# Altium PCB Push_Pull_Pot_Breakout.PcbDoc
Units mil, origin at the board's own origin, x right, y up, seen from the top; angles counter-clockwise.
Board outline 870 x 1070 mil, 2 copper layers (Top Layer, Bottom Layer); 2 components, 10 nets, 20 pads, 2 vias.
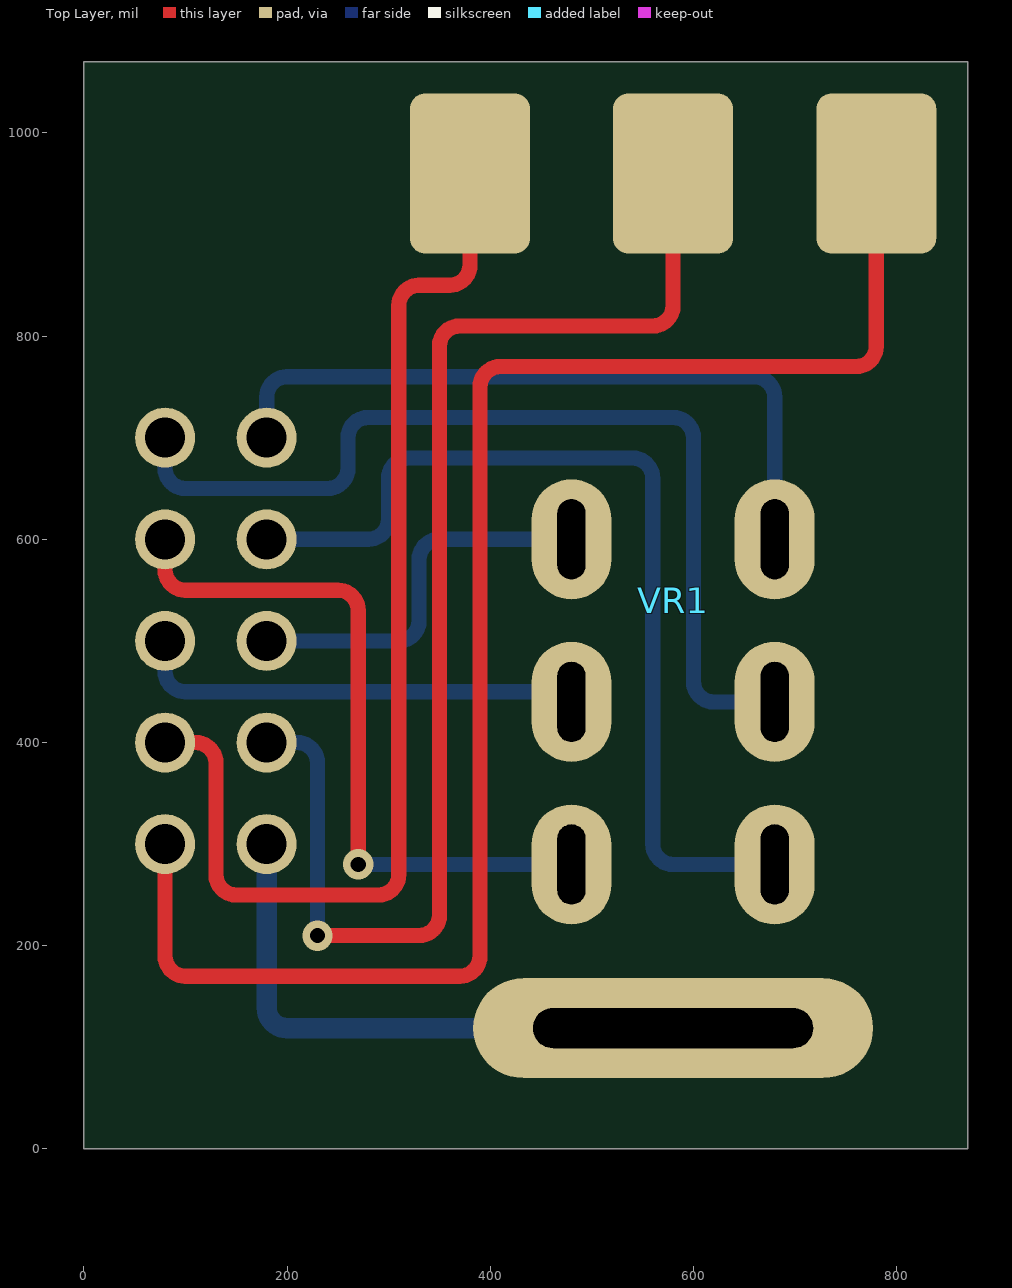
[diagram p0: Top Layer view]
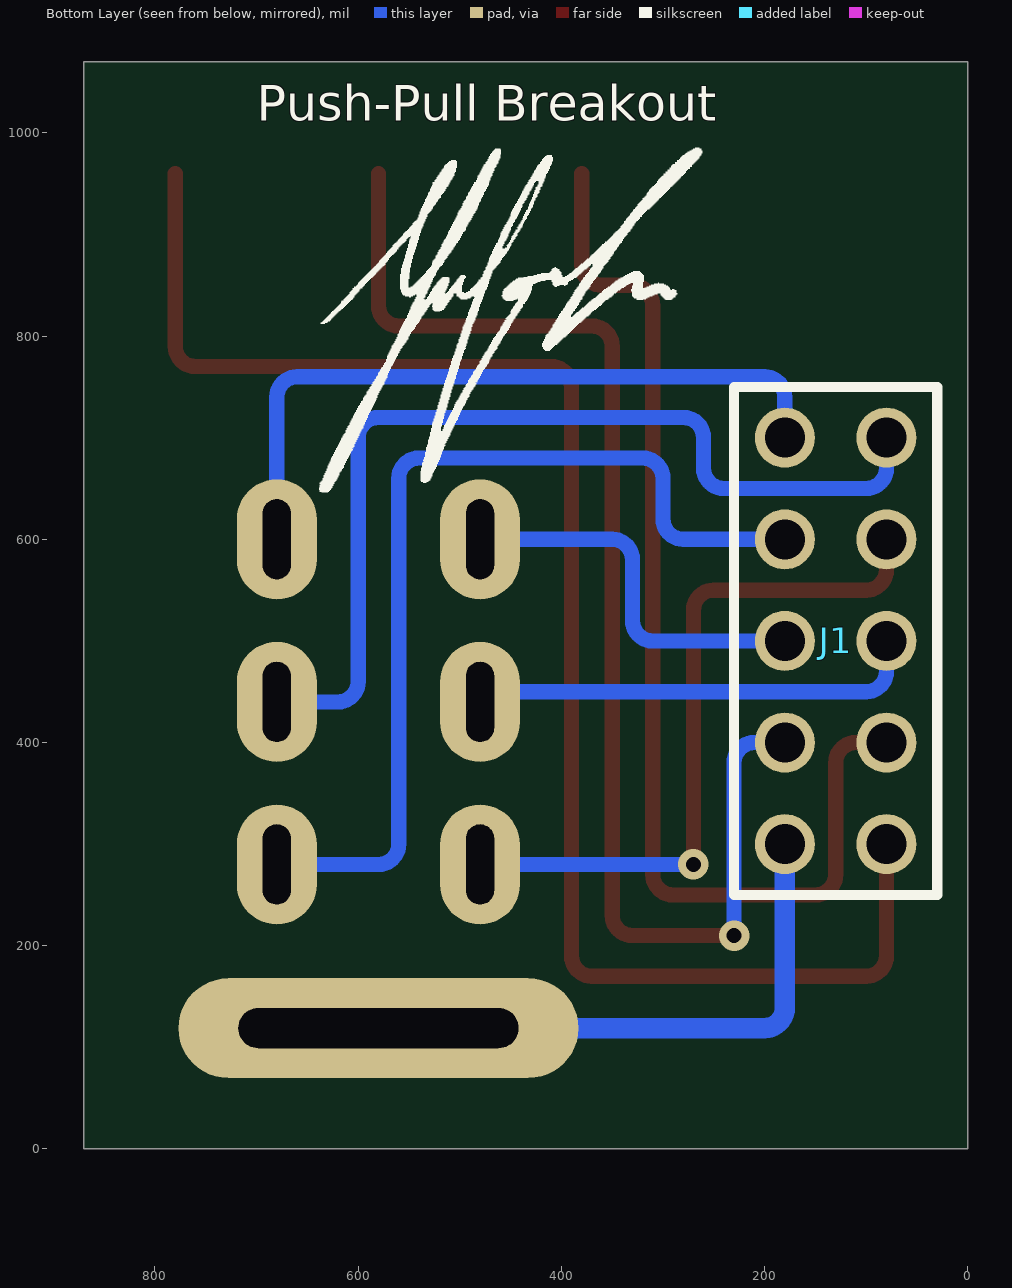
[diagram p1: Bottom Layer view, seen from below]

## Layer stack, top to bottom
Top Solder: solder mask 0.4, Solder Resist, Dk 3.5
Top Layer: signal copper 1.4
Dielectric 1: dielectric 12.6, FR-4, Dk 4.8
Bottom Layer: signal copper 1.4
Bottom Solder: solder mask 0.4, Solder Resist, Dk 3.5

## Board outline
0,0 870,0 870,1070 0,1070

## Design rules (kind name [scope] priority, off if disabled: settings)
Clearance [All] p1: gap=10 ignorepadtopadclearanceinfootprint=FALSE except(0: Arc-Hole Track-Hole SMDPad-Hole THPad-Hole Via-Hole Fill-Hole Poly-Hole Region-Hole Text-Hole; 7: Arc-Arc Arc-Track Arc-SMDPad Arc-THPad Arc-Via Arc-Fill Arc-Poly Arc-Region Arc-Text Track-Track Track-SMDPad Track-THPad Track-Via Track-Fill Track-Poly Track-Region Track-Text)
PolygonConnect [All] p1: connectstyle=Relief reliefconductorwidth=10 reliefentries=4 polygonreliefangle="90 Angle" airgapwidth=10
RoutingVias [All] p1: holewidth=10 width=20 viastyle="Through Hole" minholewidth=10 minwidth=20 maxholewidth=15 maxwidth=30
SolderMaskExpansion [All] p1: expansion=4
Width [All] p1: maxlimit=30 minlimit=10 preferedwidth=15
30 further rules are at their usual default settings.

## Components (designator, comment, footprint, x,y, rotation, side; value= is the part's Value field where it differs from the comment)
J1 "CONN HEADER VERT 10POS 2.54MM" "CONN HEADER VERT 10POS 2.54MM" 180,300 r90 bottom
VR1 "Push-Pull Potentiometer" "PUSH-PULL POTENTIOMETER" 480,600 r0 top

## Footprints (in the part's own frame and the unit in brackets; to place one, negate y for a bottom-side part, rotate by r counter-clockwise, add the part's x,y. Pads: shape width x height; smd on the part's side, far side on the other; paste and mask are expansions set on the pad)
"CONN HEADER VERT 10POS 2.54MM" [mm] "Connector Header Through Hole 10 position 0.100\" (2.54mm)"
  round 1.5 hole 1: 1(0,0) 2(2.54,0) 3(5.08,0) 4(7.62,0) 5(10.16,0) 6(10.16,-2.54) 7(7.62,-2.54) 8(5.08,-2.54) 9(2.54,-2.54) 10(0,-2.54)
  silkscreen extent -1.27,-3.81 11.43,1.27, body extent -1.27,-3.81 11.43,1.27, height 8.38
"PUSH-PULL POTENTIOMETER" [mm] "Push Pull Potentiometer"
  rrect25% 3x4 smd: 1(-2.54,9.144) 2(2.54,9.144) 3(7.62,9.144)
  oval 2x3 hole 2 slot 0.7 at 0 deg: 4(5.08,0) 5(5.08,-4.064) 6(5.08,-8.128) 7(0,-8.128) 8(0,-4.064) 9(0,0)
  oval 10x2.5 hole 1 slot 7 at 0 deg: 10(2.54,-12.22)

## Part data
J1: "Connector Header Through Hole 10 position 0.100\" (2.54mm)", Digikey Part Number=SAM8999-ND, Manufacturer="Samtec Inc."

## Via types
v1: diameter 30, hole 15, Top Layer to Bottom Layer, tented both sides, 2 vias

## Nets (pads, with @x,y where several pads share a name; then routed paths per layer and width w, separated by ;. In a path a pad name is that pad's centre, name@x,y a point inside that pad or via, vN(x,y) a via of type N, cw(c..) or ccw(c..) an arc to the next point about the centre after c; other vN are vias at no path point)
A: J1.9 VR1.1 | length 1117.1
  Top Layer w15: J1.9 110,400 cw(c110,380) 130,380 130,270 ccw(c150,270) 150,250 290,250 ccw(c290,270) 310,270 310,830 cw(c330,830) 330,850 360,850 ccw(c360,870) 380,870 VR1.1
B: J1.10 VR1.3 | length 1585.7
  Top Layer w15: J1.10 80,190 ccw(c100,190) 100,170 370,170 ccw(c370,190) 390,190 390,750 cw(c410,750) 410,770 760,770 ccw(c760,790) 780,790 VR1.3
GND: J1.1 VR1.10 | length 572.5
  Bottom Layer w20: J1.1 180,138.9 ccw(c200,138.9) 200,118.9 VR1.10
SW1_IN1: J1.3 VR1.9 | length 382.8
  Bottom Layer w15: J1.3 310,500 ccw(c310,520) 330,520 330,580 cw(c350,580) 350,600 VR1.9
SW1_IN2: J1.7 VR1.7 | length 702.8
  Top Layer w15: J1.7 80,570 ccw(c100,570) 100,550 250,550 cw(c250,530) 270,530 v1(270,280)
  Bottom Layer w15: v1(270,280) VR1.7
SW1_OUT: J1.8 VR1.8 | length 447.1
  Bottom Layer w15: J1.8 80,470 ccw(c100,470) 100,450 470,450 cw(c470,440) VR1.8
SW2_IN1: J1.5 VR1.4 | length 702.8
  Bottom Layer w15: J1.5 180,740 cw(c200,740) 200,760 660,760 cw(c660,740) 680,740 VR1.4
SW2_IN2: J1.4 VR1.6 | length 945.7
  Bottom Layer w15: J1.4 280,600 ccw(c280,620) 300,620 300,660 cw(c320,660) 320,680 540,680 cw(c540,660) 560,660 560,300 ccw(c580,300) 580,280 VR1.6
SW2_OUT: J1.6 VR1.5 | length 957.1
  Bottom Layer w15: J1.6 80,670 ccw(c100,670) 100,650 240,650 ccw(c240,670) 260,670 260,700 cw(c280,700) 280,720 580,720 cw(c580,700) 600,700 600,460 ccw(c620,460) 620,440 VR1.5
W: J1.2 VR1.2 | length 1305.7
  Top Layer w15: v1(230,210) 330,210 ccw(c330,230) 350,230 350,790 cw(c370,790) 370,810 560,810 ccw(c560,830) 580,830 VR1.2
  Bottom Layer w15: J1.2 210,400 cw(c210,380) 230,380 v1(230,210)

## Silkscreen, mask and mechanical layers (free items; w line width, h text height)
Bottom Overlay:
  region: 3803 vertices and 1 holes, not listed, extent 261.49,646.12 638.51,985.44
  text "Push-Pull Breakout" at 700,1000 h60
Outline:
  the board outline again, w10